# Altium PCB Tetris-Taha.a-Lab_Altium.pcbdoc
Units mm, origin at the board's own origin, x right, y up, seen from the top; angles counter-clockwise.
Board outline 103.82 x 133.15 mm, 2 copper layers (Top Layer, Bottom Layer); 3 components, 9 nets, 57 pads, 0 vias.
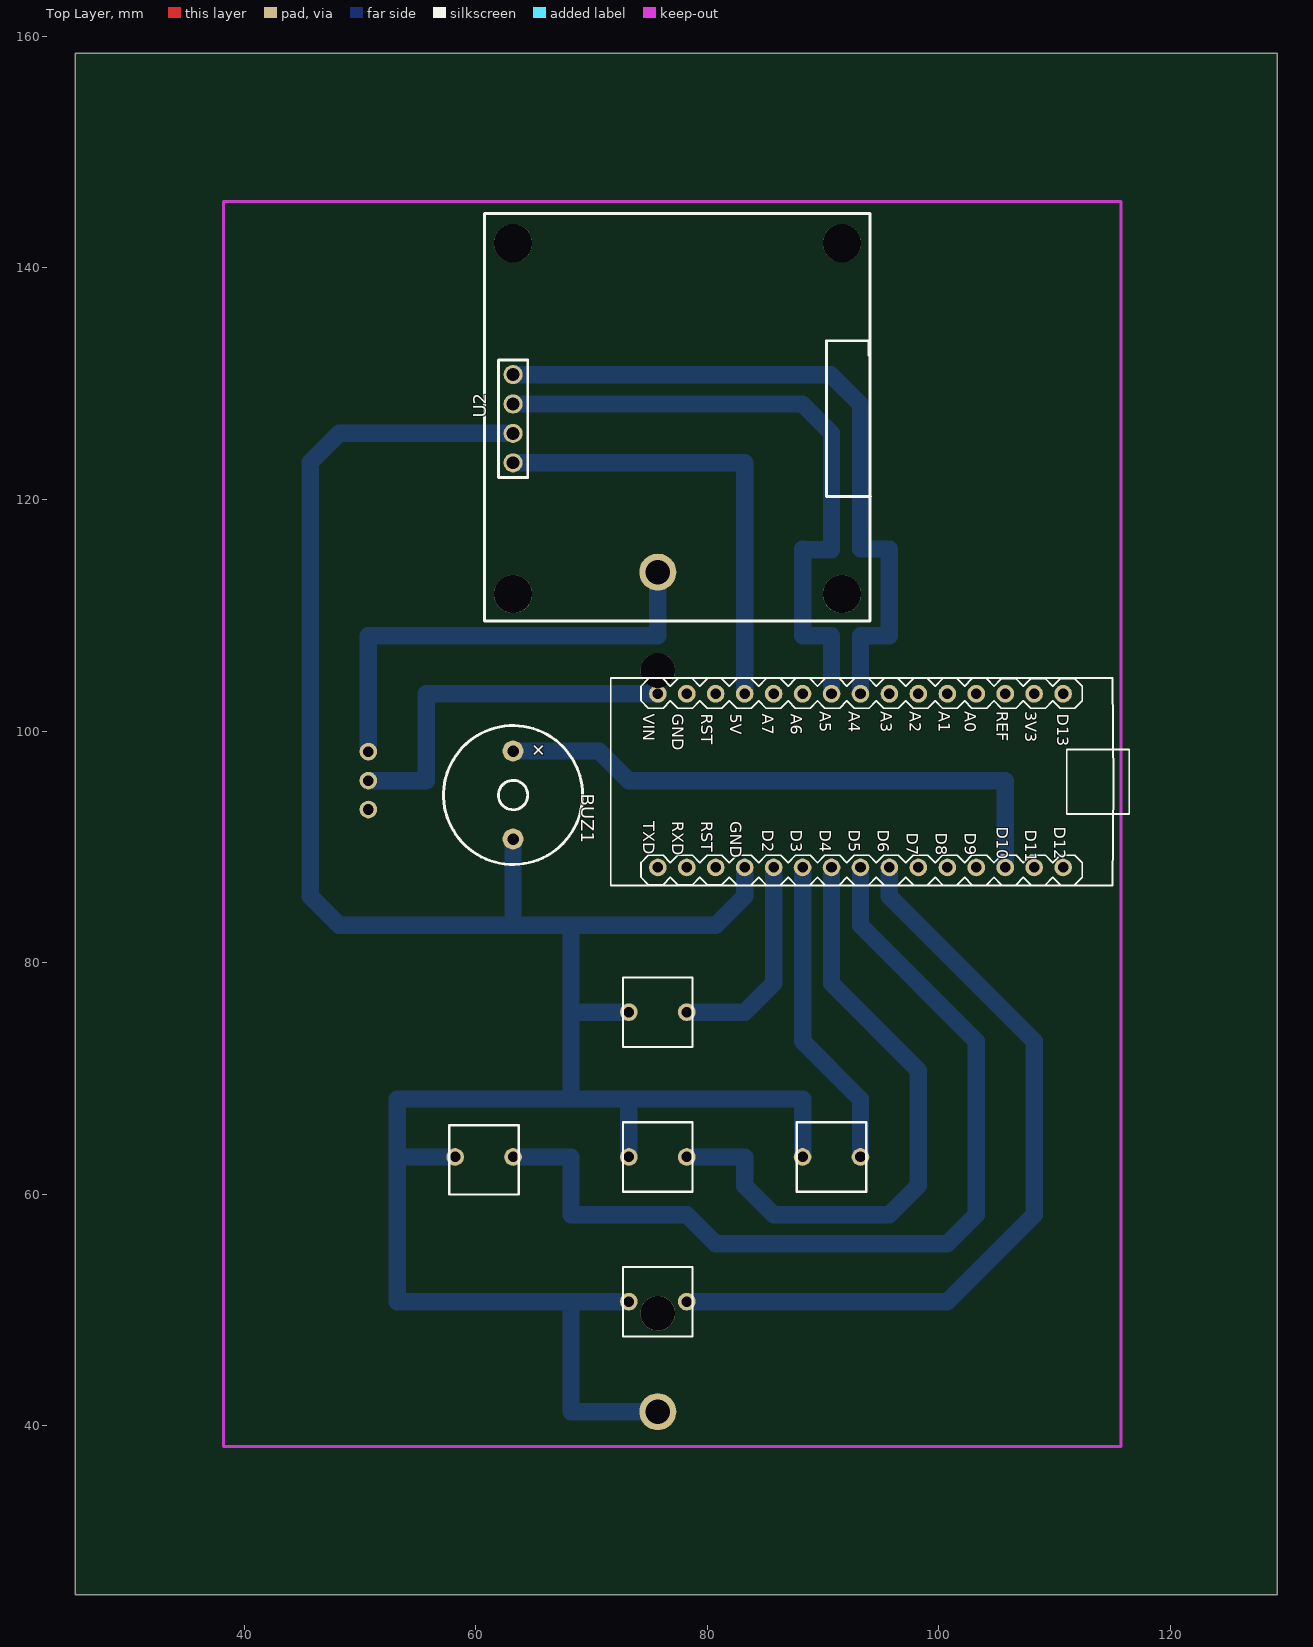
[diagram p0: Top Layer view]
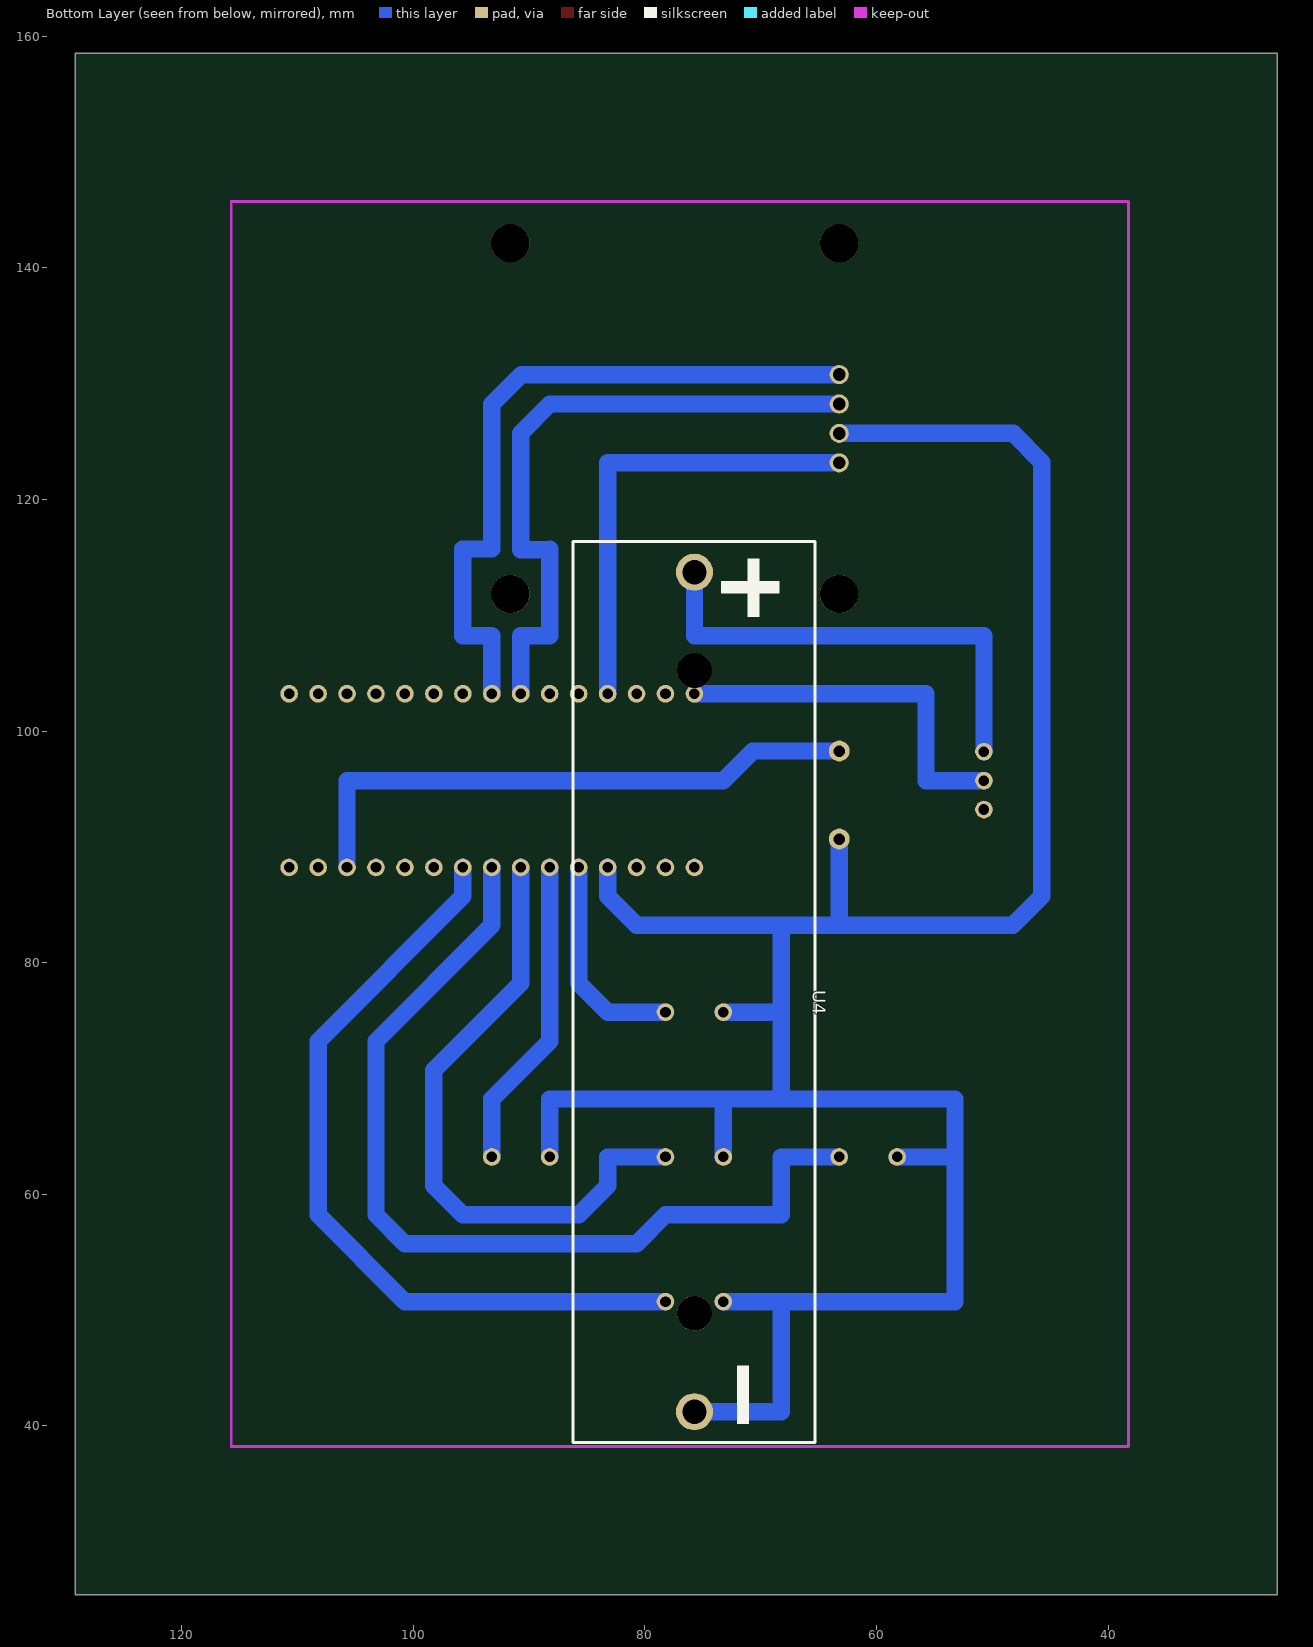
[diagram p1: Bottom Layer view, seen from below]

## Layer stack, top to bottom
Top Layer: signal copper (thickness not stored)
Dielectric: dielectric 0.32, FR-4, Dk 4.8
Bottom Layer: signal copper (thickness not stored)

## Board outline
129.217,25.4 25.4,25.4 25.4,158.554 129.217,158.554

## Components (designator, comment, footprint, x,y, rotation, side; value= is the part's Value field where it differs from the comment)
BUZ1 "BUZ-TH_BD12.0-P7.60-D0.6-FD" BUZ-TH_BD12.0-P7.60-D0.6-FD 63.227,94.477 r270 top
U2 "OLED-TH12864" OLED-TH12864 63.227,126.977 r90 top
U4 "BAT-TH_18650-A5BJ001" BAT-TH_18650-A5BJ001 75.727,77.477 r90 bottom

## Footprints (in the part's own frame and the unit in brackets; to place one, negate y for a bottom-side part, rotate by r counter-clockwise, add the part's x,y. Pads: shape width x height; smd on the part's side, far side on the other; paste and mask are expansions set on the pad)
BAT-TH_18650-A5BJ001 [mm]
  round 3.2 hole 2.1 paste+0 mask+0.05: 1(36.25,0) 2(-36.25,0)
  round 3 hole 3 unplated paste+0: ""(-27.75,0) ""(27.75,0)
  silkscreen extent -38.9,-10.4 38.9,10.5
BUZ-TH_BD12.0-P7.60-D0.6-FD [mm]
  round 1.8 hole 1 paste+0 mask+0.051: 1(-3.8,0) 2(3.8,0)
  silkscreen extent -6,-6 6,6
OLED-TH12864 [mm]
  round 1.65 hole 1.1 paste+0 mask+0.05: 1(-3.81,0) 2(-1.27,0) 3(1.27,0) 4(3.81,0)
  round 3.3 hole 3.3 unplated paste+0: ""(-15.15,0) ""(-15.15,-28.4) ""(15.15,0) ""(15.15,-28.4)
  silkscreen extent -17.48,-30.86 17.71,2.46

## Free pads (board coordinates)
  round 1.524 hole 0.914 paste+0.102 mask+0.051: 1(90.727,88.227) 1(90.727,103.227) 2(93.227,63.227) 2(93.227,88.227) 2(93.227,103.227) 3(95.727,88.227) 3(95.727,103.227) 4(73.227,50.727) 4(73.227,63.227) 4(73.227,75.727) 4(98.227,88.227) 4(98.227,103.227) 5(75.727,103.227) 5(100.727,88.227) 5(100.727,103.227) 6(78.227,50.727) 6(78.227,63.227) 6(78.227,75.727) 6(78.227,88.227) 6(78.227,103.227) 6(103.227,88.227) 6(103.227,103.227) 7(80.727,88.227) 7(80.727,103.227) 7(105.727,88.227) 7(105.727,103.227) 8(58.227,63.227) 8(83.227,88.227) 8(83.227,103.227) 8(108.227,88.227) 8(108.227,103.227) 9(85.727,88.227) 9(85.727,103.227) 9(110.727,88.227) 9(110.727,103.227) 10(63.227,63.227) 10(88.227,63.227) 10(88.227,88.227) 10(88.227,103.227) 12(75.727,88.227) 14(50.727,98.227) 15(50.727,95.727) 16(50.727,93.227)

## Nets (pads, with @x,y where several pads share a name; then routed paths per layer and width w, separated by ;. In a path a pad name is that pad's centre, name@x,y a point inside that pad or via, vN(x,y) a via of type N, cw(c..) or ccw(c..) an arc to the next point about the centre after c; other vN are vias at no path point)
S$51358: 
S$51813: pad.14 U4.1 | length 40.5
  Bottom Layer w1.5: pad.14 50.727,108.227 75.727,108.227 U4.1
S$51817: pad.5@75.727,103.227 pad.15 | length 32.5
  Bottom Layer w1.5: pad.15 55.727,95.727 55.727,103.227 pad.5@75.727,103.227
S$51903: pad.8@83.227,103.227 U2.1 | length 39.9
  Bottom Layer w1.5: U2.1@63.227,123.167 83.227,123.167 pad.8@83.227,103.227
S$51907: BUZ1.2 pad.1@90.727,88.227 pad.2@93.227,88.227 pad.3@95.727,88.227 pad.4@73.227,50.727 pad.4@73.227,63.227 pad.4@73.227,75.727 pad.6@78.227,50.727 pad.6@78.227,63.227 pad.6@78.227,75.727 pad.8@58.227,63.227 pad.8@83.227,88.227 pad.9@85.727,88.227 pad.10@63.227,63.227 pad.10@88.227,63.227 U2.2 U4.2 | length 454.6
  Bottom Layer w1.5: pad.8@58.227,63.227 53.227,63.227 ; pad.10@63.227,63.227 68.227,63.227 68.227,58.227 78.227,58.227 80.727,55.727 100.727,55.727 103.227,58.227 103.227,73.227 93.227,83.227 pad.2@93.227,88.227 ; BUZ1.2 63.227,83.227 ; U2.2@63.227,125.707 48.207,125.707 45.727,123.227 45.727,85.727 48.227,83.227 63.227,83.227 ; 68.227,50.727 68.227,41.227 U4.2 ; 69.619,83.227 63.227,83.227 ; pad.4@73.226,63.228 73.226,68.227 ; pad.4@73.227,50.727 53.227,50.727 53.227,63.227 ; pad.4@73.227,75.727 68.227,75.727 ; pad.6@78.227,50.727 100.727,50.727 108.227,58.227 108.227,73.227 95.727,85.727 pad.3@95.727,88.227 ; pad.6@78.227,63.227 83.227,63.227 83.227,60.727 85.727,58.227 95.727,58.227 98.227,60.727 98.227,70.727 90.727,78.227 pad.1@90.727,88.227 ; pad.6@78.227,75.727 83.227,75.727 85.727,78.227 pad.9@85.727,88.227 ; pad.8@83.227,88.227 83.227,85.727 80.727,83.227 78.227,83.227 68.227,83.227 68.227,75.727 ; pad.10@88.227,63.227 88.227,68.227 68.227,68.227 ; 53.227,63.227 53.227,68.227 68.227,68.227 ; 68.227,68.227 68.227,75.727
S$51917: pad.1@90.727,103.227 U2.3 | length 56.1
  Bottom Layer w1.5: U2.3@63.226,128.247 88.207,128.247 90.726,125.727 90.726,115.674 88.28,115.674 88.227,115.727 88.227,108.227 90.727,108.227 pad.1@90.727,103.227
S$51921: pad.2@93.227,103.227 U2.4 | length 61.1
  Bottom Layer w1.5: U2.4@63.227,130.787 90.667,130.787 93.227,128.227 93.227,115.727 95.727,115.727 95.727,108.227 93.227,108.227 pad.2@93.227,103.227
S$51988: pad.2@93.227,63.227 pad.10@88.227,88.227 | length 27.1
  Bottom Layer w1.5: pad.10@88.227,88.227 88.227,73.227 93.227,68.227 pad.2@93.227,63.227
S$69816: BUZ1.1 pad.7@105.727,88.227 | length 51.1
  Bottom Layer w1.5: BUZ1.1 70.677,98.277 73.227,95.727 105.727,95.727 pad.7@105.727,88.227
pads on no net: U2. U4.

## Silkscreen, mask and mechanical layers (free items; w line width, h text height)
Top Overlay:
  drawing of 232 lines, arcs and shapes, not listed
  text "A5" at 89.727,101.727 h1 r270
  text "A4" at 92.227,101.727 h1 r270
  text "A3" at 94.977,101.727 h1 r270
  text "A2" at 97.477,101.727 h1 r270
  text "A1" at 99.977,101.727 h1 r270
  text "A0" at 102.227,101.727 h1 r270
  text "REF" at 104.977,101.727 h1 r270
  text "3V3" at 107.477,101.727 h1 r270
  text "VIN" at 74.477,101.477 h1 r270
  text "GND" at 76.977,101.477 h1 r270
  text "RST" at 79.477,101.477 h1 r270
  text "5V" at 81.977,101.477 h1 r270
  text "A7" at 84.727,101.477 h1 r270
  text "A6" at 87.227,101.477 h1 r270
  text "D13" at 110.227,101.477 h1 r270
  text "TXD" at 74.477,92.227 h1 r270
  text "RXD" at 76.977,92.227 h1 r270
  text "RST" at 79.477,92.227 h1 r270
  text "GND" at 81.977,92.227 h1 r270
  text "D10" at 104.977,91.727 h1 r270
  text "D12" at 109.977,91.727 h1 r270
  text "D2" at 84.727,91.477 h1 r270
  text "D3" at 87.227,91.477 h1 r270
  text "D4" at 89.727,91.477 h1 r270
  text "D5" at 92.227,91.477 h1 r270
  text "D6" at 94.727,91.477 h1 r270
  text "D11" at 107.477,91.477 h1 r270
  text "D7" at 97.227,91.227 h1 r270
  text "D8" at 99.727,91.227 h1 r270
  text "D9" at 102.227,91.227 h1 r270
Document:
  region: 71.727,86.727 114.927,86.727 114.927,92.777 115.027,92.777 115.027,86.727 114.927,86.626 71.677,86.626 71.627,86.676 71.627,104.576 71.677,104.626 114.977,104.626 115.027,104.576 115.027,98.527 114.927,98.527 114.927,104.527 71.727,104.527 71.727,86.776
  region: 114.977,98.476 116.427,98.476 116.477,98.426 116.477,92.826 116.427,92.777 111.027,92.777 110.977,92.826 110.977,98.426 111.027,98.476 114.927,98.476 114.927,98.377 111.127,98.377 111.077,98.326 111.077,92.927 111.127,92.876 116.377,92.876 116.377,98.326 116.327,98.377 114.977,98.377

## Text inside footprints (layer, text, board x,y; h text height)
BUZ1: Top Overlay "+" at 64.543,98.472 h1.27 r315